# Altium PCB IDC_MCX_Adapter_front.PcbDoc
Units mm, origin at the board's own origin, x right, y up, seen from the top; angles counter-clockwise.
Board outline 37.5 x 106 mm, 4 copper layers (L1, L2, L3, L4), stack 1.527 mm thick; 38 components, 65 nets, 241 pads, 91 vias.
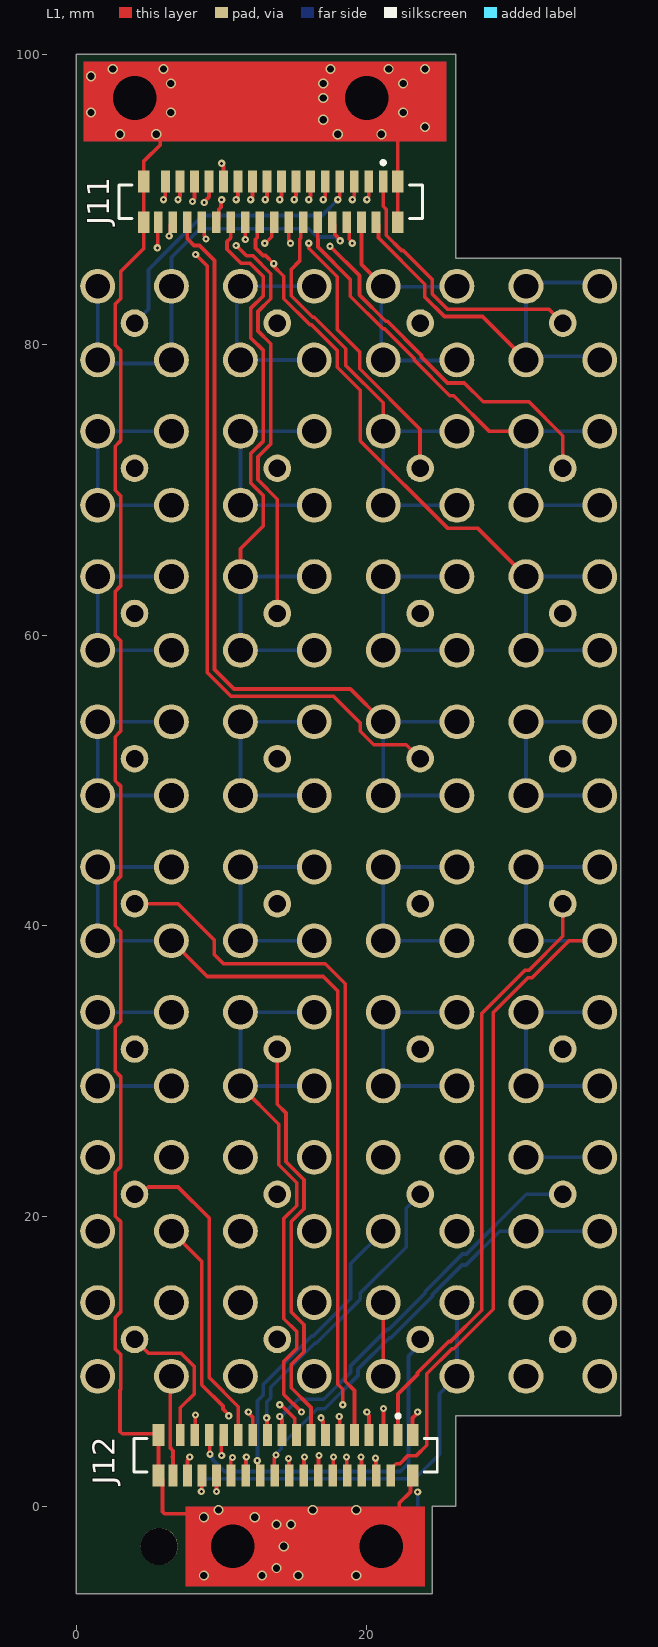
[diagram p0: L1 view]
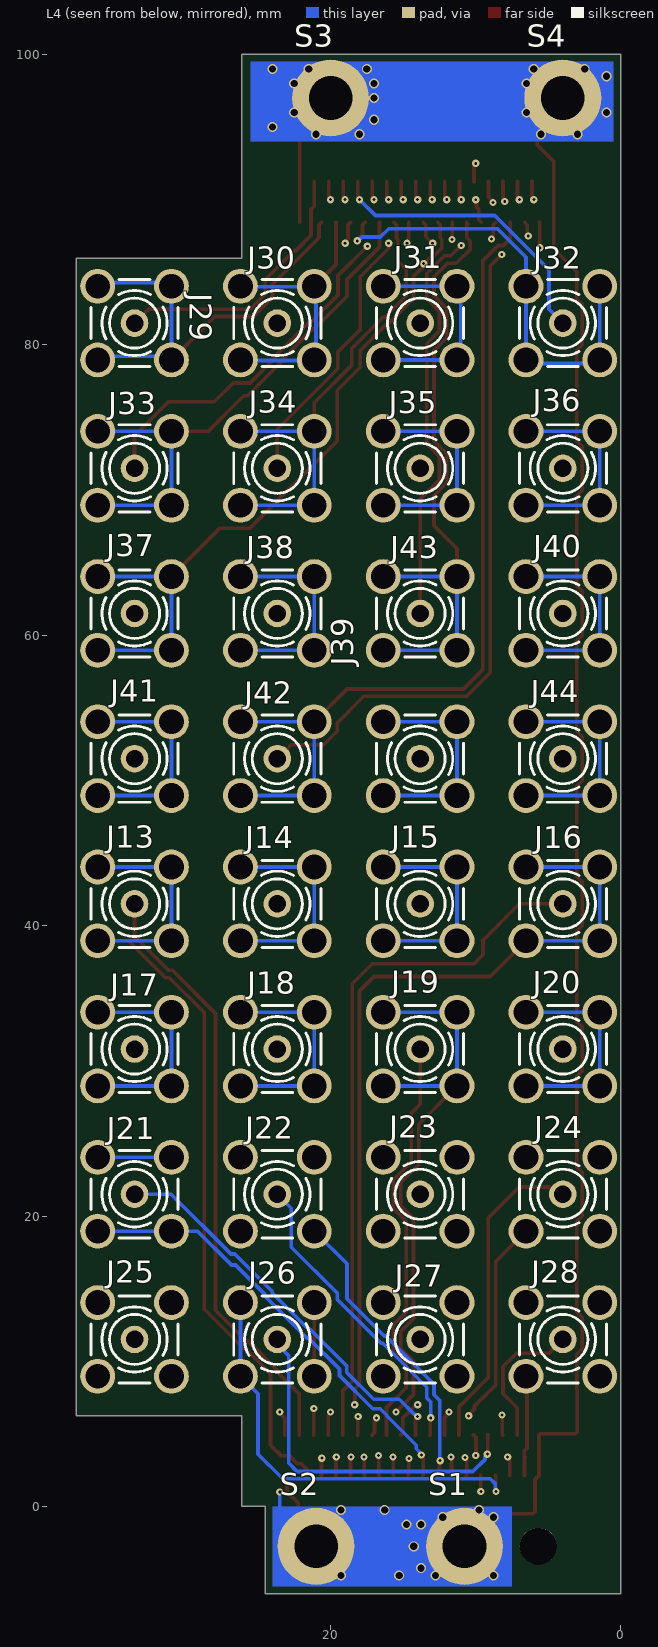
[diagram p1: L4 view, seen from below]
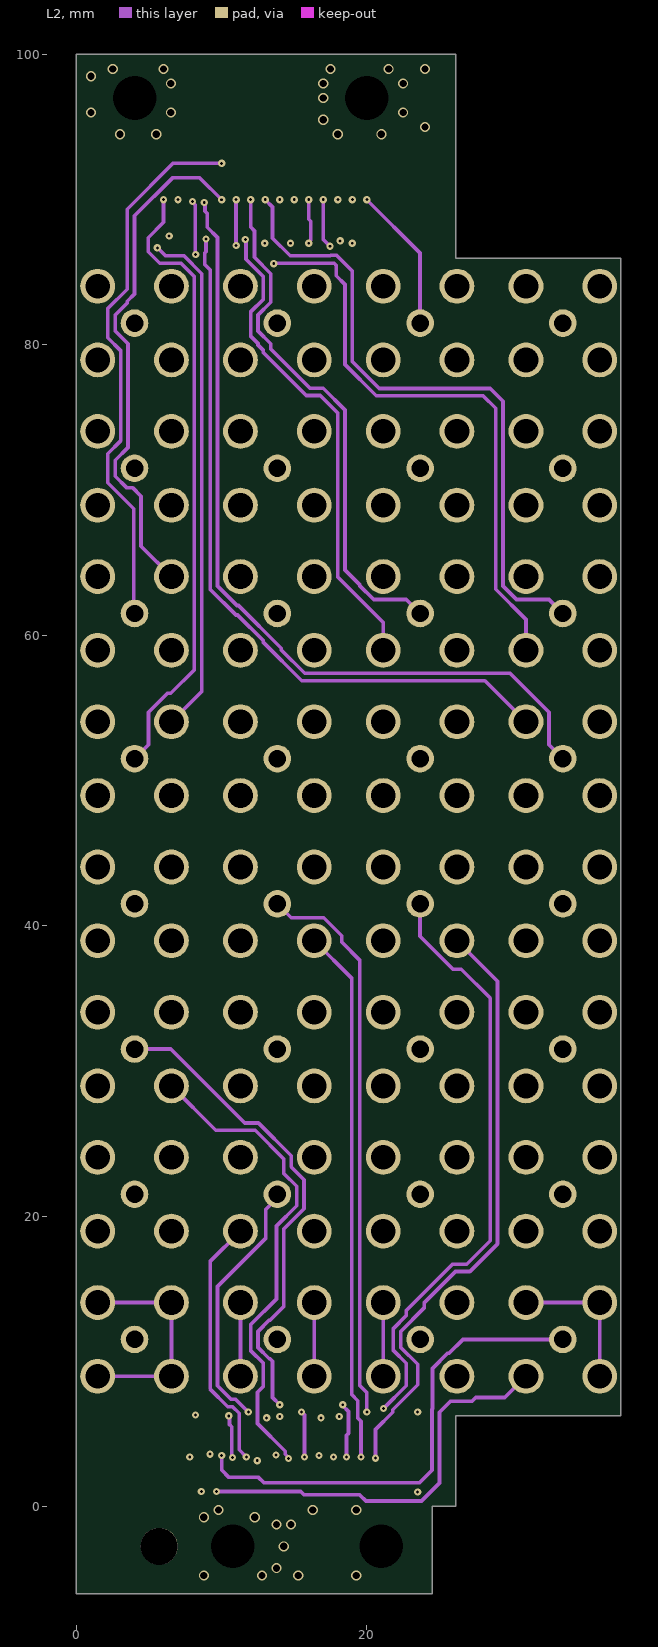
[diagram p2: L2]
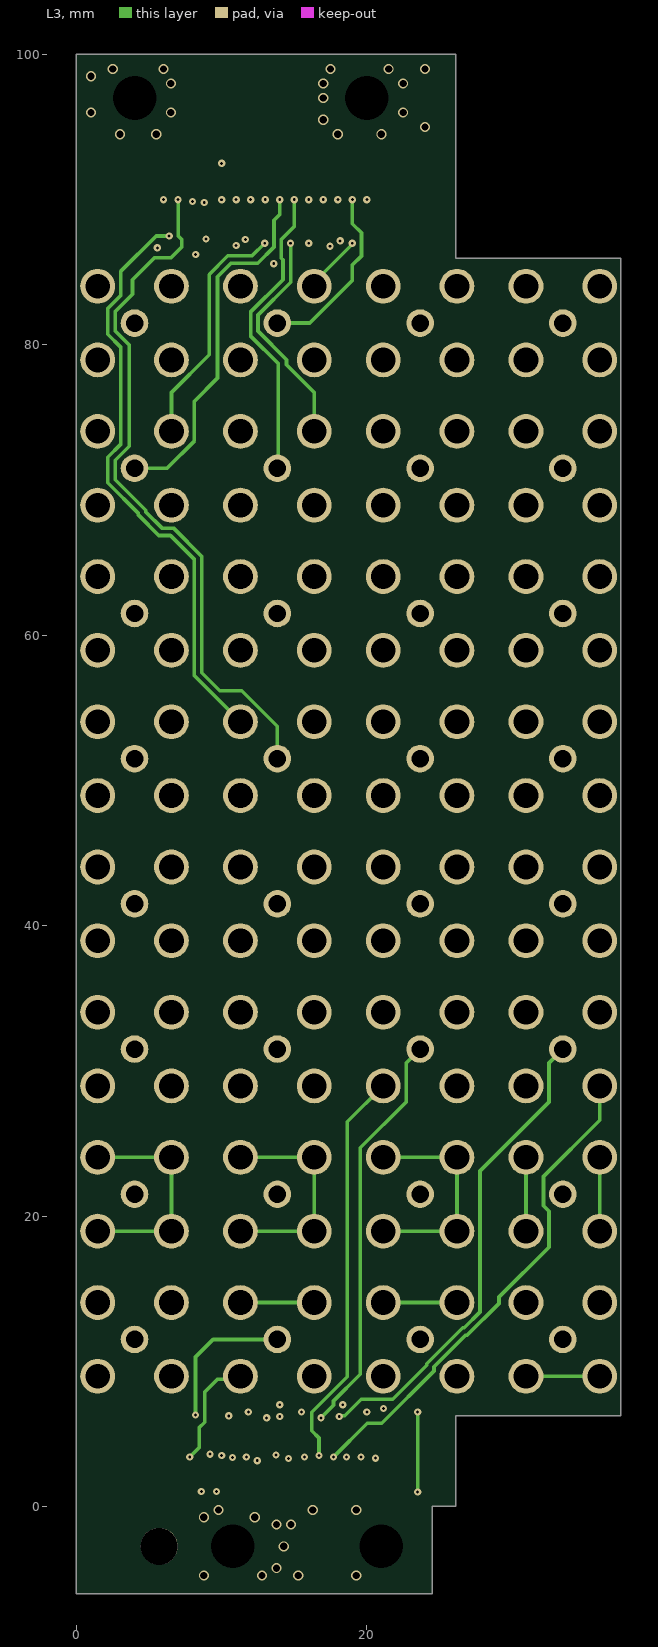
[diagram p3: L3]
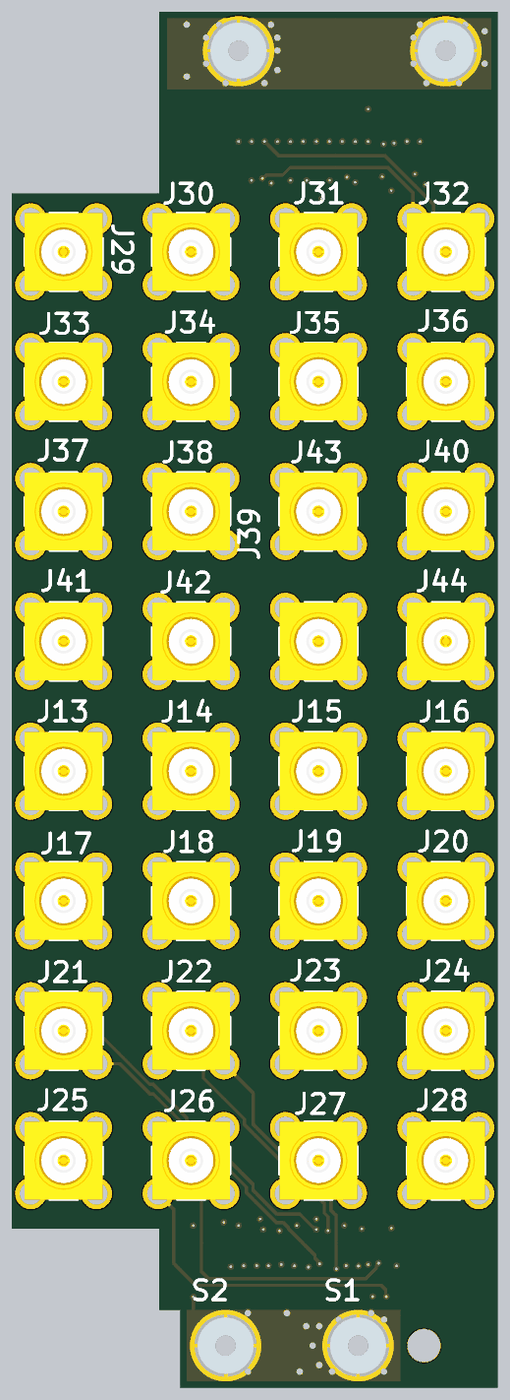
[diagram p4: 3D render of the assembled board from below, using the file's embedded part models]

## Layer stack, top to bottom
Top Solder: solder mask 0.034, Solder Resist, Dk 3.5
L1: signal copper 0.035
Dielectric1: core 0.36, PP-021, Dk 4.7
L2: signal copper 0.018
Dielectric 5a: prepreg 0.7, PP-021, Dk 4.7
L3: signal copper 0.018
Dielectric7: core 0.36, PP-021, Dk 4.7
L4: signal copper 0.0356
Bottom Solder: solder mask 0.034, Solder Resist, Dk 3.5

## Board outline
0,-6 0,100 26.125,100 26.125,85.98 37.5,85.98 37.5,6.25 26.125,6.25 26.125,0 24.5,0 24.5,-6

## Design rules (kind name [scope] priority, off if disabled: settings)
Clearance [All] p1: gap=0.254 ignorepadtopadclearanceinfootprint=FALSE except(0: Arc-Hole Track-Hole SMDPad-Hole THPad-Hole Via-Hole Fill-Hole Poly-Hole Region-Hole Text-Hole)
PolygonConnect [All] p1: connectstyle=Relief reliefconductorwidth=0.254 reliefentries=4 polygonreliefangle="90 Angle" airgapwidth=0.254
RoomDefinition IDC_MCX_Adapter_Front [InComponentClass('IDC_MCX_Adapter_Front')] p1: confinementstyle=ConfineIn formatcopy=TRUE lockcomponents=FALSE outline 38.663,-1.121 337.353,-1.121 337.353,23.68 38.663,23.68
RoutingVias [All] p1: holewidth=0.711 width=1.27 viastyle="Through Hole" minholewidth=0.2 minwidth=0.5 maxholewidth=0.711 maxwidth=1.27
SolderMaskExpansion [All] p1: expansion=0.102 istentingtop=FALSE
Width [All] p1: maxlimit=0.254 minlimit=0.254 preferedwidth=0.254
30 further rules are at their usual default settings.

## Components (designator, comment, footprint, x,y, rotation, side; value= is the part's Value field where it differs from the comment)
J11 "52559-3252" MOLX-52559-3252 13.375,89.85 r180 top
J12 "52559-3252" MOLX-52559-3252 14.4,3.525 r180 top
J13 "MCX" AMPHENOL_919-109J-51PX 33.5,41.5 r90 bottom
J14 "MCX" AMPHENOL_919-109J-51PX 23.667,41.5 r90 bottom
J15 "MCX" AMPHENOL_919-109J-51PX 13.833,41.5 r90 bottom
J16 "MCX" AMPHENOL_919-109J-51PX 4,41.5 r90 bottom
J17 "MCX" AMPHENOL_919-109J-51PX 33.5,31.5 r90 bottom
J18 "MCX" AMPHENOL_919-109J-51PX 23.667,31.5 r90 bottom
J19 "MCX" AMPHENOL_919-109J-51PX 13.833,31.5 r90 bottom
J20 "MCX" AMPHENOL_919-109J-51PX 4,31.5 r90 bottom
J21 "MCX" AMPHENOL_919-109J-51PX 33.5,21.5 r90 bottom
J22 "MCX" AMPHENOL_919-109J-51PX 23.667,21.5 r90 bottom
J23 "MCX" AMPHENOL_919-109J-51PX 13.833,21.5 r90 bottom
J24 "MCX" AMPHENOL_919-109J-51PX 4,21.5 r90 bottom
J25 "MCX" AMPHENOL_919-109J-51PX 33.5,11.5 r90 bottom
J26 "MCX" AMPHENOL_919-109J-51PX 23.667,11.5 r90 bottom
J27 "MCX" AMPHENOL_919-109J-51PX 13.833,11.5 r90 bottom
J28 "MCX" AMPHENOL_919-109J-51PX 4,11.5 r90 bottom
J29 "MCX" AMPHENOL_919-109J-51PX 33.5,81.5 r180 bottom
J30 "MCX" AMPHENOL_919-109J-51PX 23.667,81.5 r90 bottom
J31 "MCX" AMPHENOL_919-109J-51PX 13.833,81.5 r90 bottom
J32 "MCX" AMPHENOL_919-109J-51PX 4,81.5 r90 bottom
J33 "MCX" AMPHENOL_919-109J-51PX 33.5,71.5 r90 bottom
J34 "MCX" AMPHENOL_919-109J-51PX 23.667,71.5 r90 bottom
J35 "MCX" AMPHENOL_919-109J-51PX 13.833,71.5 r90 bottom
J36 "MCX" AMPHENOL_919-109J-51PX 4,71.5 r90 bottom
J37 "MCX" AMPHENOL_919-109J-51PX 33.5,61.5 r90 bottom
J38 "MCX" AMPHENOL_919-109J-51PX 23.667,61.5 r90 bottom
J39 "MCX" AMPHENOL_919-109J-51PX 13.833,61.5 r90 bottom
J40 "MCX" AMPHENOL_919-109J-51PX 4,61.5 r90 bottom
J41 "MCX" AMPHENOL_919-109J-51PX 33.5,51.5 r90 bottom
J42 "MCX" AMPHENOL_919-109J-51PX 23.667,51.5 r90 bottom
J43 "MCX" AMPHENOL_919-109J-51PX 13.833,51.5 r90 bottom
J44 "MCX" AMPHENOL_919-109J-51PX 4,51.5 r180 bottom
S1 "9774035243" 9774035243 10.775,-2.75 r0 bottom
S2 "9774035243" 9774035243 21,-2.75 r0 bottom
S3 "9774035243" 9774035243 20,97 r0 bottom
S4 "9774035243" 9774035243 4,97 r0 bottom

## Footprints (in the part's own frame and the unit in brackets; to place one, negate y for a bottom-side part, rotate by r counter-clockwise, add the part's x,y. Pads: shape width x height; smd on the part's side, far side on the other; paste and mask are expansions set on the pad)
9774035243 [mm] "SMD Steel Spacer with internal Thread"
  round 5.3 smd paste-576.133: 1(0,0)
  round 0 hole 3 unplated: ""(0,0)
  body extent -2.17,-2.17 2.18,2.17, height 3.5
AMPHENOL_919-109J-51PX [mm] "50 Ohm, RF Connector, MCX Straight PCB Receptacle Jack"
  round 1.9 hole 1.2: 1(0,0)
  round 2.4 hole 1.7: 2(-2.54,-2.54) 2(-2.54,2.54) 2(2.54,-2.54) 2(2.54,2.54)
  silkscreen extent -3,-3 3,3, body extent -3,-3 3,3, height 6.06
MOLX-52559-3252 [mm] "FPC Connector, 32-Leads, Vertical, Pitch 0.5 mm, Mated Height 3.9 mm, SMT"
  rect 0.6x1.5 smd: 1(-7.75,-1.4) 2(-7.25,1.4) 3(-6.75,-1.4) 4(-6.25,1.4) 5(-5.75,-1.4) 6(-5.25,1.4) 7(-4.75,-1.4) 8(-4.25,1.4) 9(-3.75,-1.4) 10(-3.25,1.4) 11(-2.75,-1.4) 12(-2.25,1.4) 13(-1.75,-1.4) 14(-1.25,1.4) 15(-0.75,-1.4) 16(-0.25,1.4) 17(0.25,-1.4) 18(0.75,1.4) 19(1.25,-1.4) 20(1.75,1.4) 21(2.25,-1.4) 22(2.75,1.4) 23(3.25,-1.4) 24(3.75,1.4) 25(4.25,-1.4) 26(4.75,1.4) 27(5.25,-1.4) 28(5.75,1.4) 29(6.25,-1.4) 30(6.75,1.4) 31(7.25,-1.4) 32(7.75,1.4)
  rect 0.8x1.5 smd: MP1(-8.75,-1.4) MP2(-8.75,1.4) MP3(8.75,-1.4) MP4(8.75,1.4)
  silkscreen extent -10.45,-2.82 10.45,1.15, body extent -10.85,-1.65 10.85,1.85, height 5.3

## Part data
J11 J12: library part CMP-1241-00306-1, "0.5 mm Pitch Easy-On(TM) Type FPC Connector, 3.9 mm Mated Height, Vertical, ZIF, SMT, 32 Circuits, -40 to 85 degC, ELV and RoHS Compliant, Tape and Reel", Current (Max per Contact)=0.5A, Manufacturer=Molex, Voltage (Max)="50V AC (RMS)/DC", Circuits (Loaded)=32, ComponentLink1Description="Manufacturer URL", ComponentLink1URL=http://www.molex.com/molex/index.jsp, ComponentLink2Description=Datasheet, ComponentLink2URL=http://www.molex.com/webdocs/datasheets/pdf/en-us/0525593252_FFC_FPC_CONNECTORS.pdf, ComponentLink3Description="Package Specification", ComponentLink3URL=http://www.molex.com/pdm_docs/sd/525593252_sd.pdf, Contact Position=N/A, Durability (mating cycles max)=20, Entry Angle=Vertical, Mated Height=3.90mm, Material - Metal="Phosphor Bronze", Material - Plating Mating=Gold, Material - Plating Termination=Tin, Mounting Technology="Surface Mount", Number of Rows=1, Orientation=Vertical, PackageDescription="32-Lead FPC Connector, Pitch 0.5 mm", PackageReference=52559-3252, PackageVersion="Rev. B, 12/2011", Packing="Tape and Reel", PartNumber=52559-3252, PCB Locator=No, PCB Retention=Yes, Pitch - Mating Interface=0.50mm, Polarized to PCB=No, RoHS=TRUE, Stackable=No
J13 J14 J15 J16 J17 J18 J19 J20 J21 J22 J23 J24 J25 J26 J27 J28 J29 J30 J31 J32 J33 J34 J35 J36 J37 J38 J39 J40 J41 J42 J43 J44: library part AMPHENOL_919-109J-51PX, Manufacturer=AMPHENOL, Manufacturer Part Number="919-109J-51PX (MCX6251B1-3GT30G-50)", Author="CERN DEM BC", Component Type=Standard, ComponentHeight=6.06mm, CreateDate=31.01.2019, Family=MCX, HelpURL=\\cern.ch\dfs\Applications\Altium\Datasheets\AMPHENOL_919-109J-51PX.pdf, LatestRevisionDate=31.01.2019, Mounted=Yes, Part Description="50 Ohm, RF Connector, MCX Straight PCB Receptacle Jack", Part Number=AMPHENOL_919-109J-51PX, Pin Count=5, PressFit=No, Sense=No, SMD=No, Socket=No, Status=None
S1 S2 S3 S4: library part "WA-SMSI,  9774035243", "WA-SMSI SMD Steel Spacer with internal Thread", Manufacturer="Wurth Elektronik", ComponentLink1Description=Manufacturer, ComponentLink1URL=http://www.we-online.de, ComponentLink2Description=Datasheet, ComponentLink2URL=http://katalog.we-online.de/em/datasheet/9774035243.pdf, Created by="Baojun Chen", Created Date=20.Oct.2015, partNo=9774035243

## Free pads (board coordinates)
  round 2.55 hole 2.55: 1(5.695,-2.75)

## Via types
v1: diameter 0.5, hole 0.2, L1 to L4, tented both sides, 59 vias
v2: diameter 0.7, hole 0.5, L1 to L4, tented both sides, 32 vias

## Nets (pads, with @x,y where several pads share a name; then routed paths per layer and width w, separated by ;. In a path a pad name is that pad's centre, name@x,y a point inside that pad or via, vN(x,y) a via of type N, cw(c..) or ccw(c..) an arc to the next point about the centre after c; other vN are vias at no path point)
CH1: J11.1 J29.1 | length 19
  L1 w0.254: J11.1 21.125,89.539 21.344,89.32 21.344,87.542 22.386,86.5 22.5,86.5 24.5,84.5 24.5,83.511 25.552,82.459 32.541,82.459 J29.1
CH2: J11.3 J30.1 | length 11.3
  L1 w0.254: v1(20,90) 20,90.067 20.125,90.192 J11.3
  L2 w0.254: v1(20,90) 23.667,86.333 J30.1
CH3: J11.5 J31.1 | length 13.5
  L1 w0.254: v1@19.125,90.192 J11.5
  L3 w0.254: J31.1 16.069,81.5 19,84.431 19,85.5 19.625,86.125 19.625,87.717 19,88.342 v1(19,90)
CH4: J11.7 J32.1 | length 20.4
  L1 w0.254: v1(18,90) 18,90.067 18.125,90.192 J11.7
  L4 w0.254: J32.1 4.959,82.459 4.959,85.177 6.032,86.25 8.692,88.911 16.911,88.911 v1(18,90)
CH5: J11.9 J33.1 | length 29.2
  L1 w0.254: v1(17,90) 17,90.067 17.125,90.192 J11.9 ; v1(17.468,86.791) 19.49,84.77 19.49,83.441 21.303,81.627 21.413,81.627 23.766,79.275 23.766,79.165 25.552,77.379 26.707,77.379 28.011,76.075 31.161,76.075 33.5,73.736 J33.1
  L2 w0.254: v1(17,90) 17,87.26 v1(17.468,86.791)
CH6: J11.11 J34.1 | length 23.1
  L1 w0.254: v1(16,87) 16,86.649 17.954,84.695 17.954,81.052 19.503,79.503 19.503,78.348 23.667,74.184 J34.1 ; v1(16,90) 16,90.067 16.125,90.192 J11.11
  L2 w0.254: v1(16,87) 16,87.067 16.139,87.206 16.139,88.511 16,88.65 v1(16,90)
CH7: J11.13 J35.1 | length 22
  L1 w0.254: v1(15,90) 15,90.067 15.125,90.192 J11.13
  L3 w0.254: J35.1 13.89,71.557 13.89,78.713 11.994,80.609 11.994,82.262 14.221,84.489 14.221,85.851 14.107,85.965 14.107,87.261 15,88.154 v1(15,90)
CH8: J11.15 J36.1 | length 26.3
  L1 w0.254: v1(14,90) 14,90.067 14.125,90.192 J11.15
  L3 w0.254: J36.1 6.236,71.5 8.121,73.385 8.121,76.121 9.712,77.712 9.712,84.695 10.638,85.621 12.481,85.621 13.599,86.739 13.599,88.582 14,88.983 v1(14,90)
CH9: J11.17 J37.1 | length 46
  L1 w0.254: v1(13,90) 13,90.067 13.125,90.192 J11.17
  L2 w0.254: v1(13,90) 13.5,89.5 13.5,87.346 14.717,86.129 17.471,86.129 17.504,86.161 17.924,86.161 19,85.086 19,78.851 20.851,77 28.5,77 29.379,76.121 29.379,63.385 30.305,62.459 32.541,62.459 J37.1
CH10: J11.19 J38.1 | length 37.2
  L1 w0.254: v1(12,90) 12,90.067 12.125,90.192 J11.19
  L2 w0.254: v1(12,90) 12,88.11 12.262,87.848 12.262,86.025 13.382,84.905 13.382,82.931 12.502,82.051 12.502,80.949 13.382,80.069 13.382,79.715 16.083,77.014 17,77.014 18.5,75.514 18.5,64.5 19.5,63.5 19.5,63.431 20.472,62.459 22.708,62.459 J38.1
CH11: J11.21 J39.1 | length 32.7
  L1 w0.254: v1(11,86.849) 11.72,86.129 12.158,86.129 13.382,84.905 13.382,83.175 12.502,82.295 12.502,80.949 13.382,80.069 13.382,73.175 12.502,72.295 12.502,70.705 13.833,69.374 J39.1 ; v1(11,90) 11,90.067 11.125,90.192 J11.21
  L2 w0.254: v1(11,86.849) 10.994,86.855 10.994,89.994 v1(11,90)
CH12: J11.23 J40.1 | length 39
  L1 w0.254: v1(10,92.5) 10,92.433 10.125,92.308 J11.23
  L2 w0.254: J40.1 3.943,61.557 3.943,68.713 2.161,70.495 2.161,72.505 3.041,73.385 3.041,79.615 2.161,80.495 2.161,82.505 3.492,83.836 3.492,89.343 6.649,92.5 v1(10,92.5)
CH13: J11.25 J41.1 | length 58.5
  L1 w0.254: v1(8.804,89.804) 8.804,89.87 9.125,90.192 J11.25
  L2 w0.254: v1(8.804,89.804) 8.851,89.757 8.851,89.195 9,89.046 9,88.104 9.712,87.392 9.712,63.385 11.052,62.045 11.162,62.045 14.11,59.097 14.11,58.987 15.718,57.379 29.857,57.379 32.541,54.695 32.541,52.459 J41.1
CH14: J11.27 J42.1 | length 51.7
  L1 w0.254: v1(8,89.869) 8,89.936 8.125,90.061 J11.27 ; v1(8.21,86.216) 9,85.427 9,57.43 10.639,55.792 17.708,55.792 19.546,53.954 19.546,53.385 20.472,52.459 22.708,52.459 J42.1
  L2 w0.254: v1(8,89.869) 8,89.802 8.173,89.63 8.173,86.254 v1(8.21,86.216)
CH15: J11.29 J43.1 | length 49
  L1 w0.254: v1@7.125,90.192 J11.29
  L3 w0.254: v1(7,90) 7,88.702 7.017,88.684 7.017,87.5 7.256,87.261 7.256,86.739 6.516,85.998 5.371,85.998 3.857,84.484 3.857,83.483 2.669,82.295 2.669,80.949 3.628,79.99 3.628,73.01 2.669,72.051 2.669,70.705 4.773,68.601 4.773,68.491 5.885,67.379 6.679,67.379 8.629,65.429 8.629,57.422 9.873,56.178 11.391,56.178 13.833,53.736 J43.1
CH16: J11.31 J44.1 | length 44.3
  L1 w0.254: v1(6,90) 6,90.067 6.125,90.192 J11.31
  L2 w0.254: J44.1 4.959,52.459 4.959,54.695 6.264,56 6.5,56 8.121,57.621 8.121,84.695 7.195,85.621 5.737,85.621 4.939,86.419 4.939,87.385 6,88.445 v1(6,90)
CH17: J12.1 J13.1 | length 41.5
  L1 w0.254: J12.1 22.15,7.747 23.492,9.089 23.492,9.21 25.646,11.364 25.767,11.364 27.921,13.518 27.921,33.955 30.893,36.927 31.163,36.927 33.5,39.264 J13.1
CH18: J12.3 J14.1 | length 43.3
  L1 w0.254: J12.3 v1(21.15,6.747)
  L2 w0.254: v1(21.15,6.747) 22.708,8.305 22.708,9.858 21.828,10.738 21.828,12.262 22.708,13.142 22.708,13.495 25.896,16.684 26.885,16.684 28.492,18.291 28.492,35.008 26.5,37 25.931,37 23.667,39.264 J14.1
CH19: J12.5 J15.1 | length 40.5
  L1 w0.254: v1(20,6.5) 20,6.433 20.15,6.283 J12.5
  L2 w0.254: J15.1 14.792,40.541 17.028,40.541 18.264,39.305 18.264,38.868 19.5,37.632 19.5,8.351 20,7.851 v1(20,6.5)
CH20: J12.7 J16.1 | length 48.7
  L1 w0.254: J16.1 7,41.5 9.5,39 9.5,38 10.121,37.379 17.129,37.379 18.508,36 18.508,8.624 19.15,7.982 J12.7
CH21: J12.9 J17.1 | length 34.5
  L1 w0.254: v1(18.1,6.2) 18.125,6.175 18.125,4.95 J12.9
  L3 w0.254: v1(18.1,6.2) 18.147,6.247 18.478,6.247 19.61,7.379 21.782,7.379 24.118,9.715 24.118,9.825 26.598,12.306 26.708,12.306 27.788,13.385 27.788,23.104 32.541,27.857 32.541,30.541 J17.1
CH22: J12.11 J18.1 | length 29.5
  L1 w0.254: v1(16.838,6.1) 16.838,6.033 16.977,5.894 16.977,5.098 J12.11
  L3 w0.254: v1(16.838,6.1) 17.708,6.97 17.708,7.261 19.546,9.099 19.546,24.695 22.708,27.857 22.708,30.541 J18.1
CH23: J12.13 J19.1 | length 29
  L1 w0.254: J19.1 13.833,27.699 14.433,27.1 14.433,23.744 15.672,22.505 15.672,20.495 14.792,19.615 14.792,13.385 15.672,12.505 15.672,10.658 14.792,9.778 14.792,8.174 16.15,6.816 J12.13
CH24: J12.15 J20.1 | length 36
  L1 w0.254: v1(14,7) 14.092,7 15.036,6.056 15.036,5.039 J12.15
  L2 w0.254: J20.1 6.5,31.5 11.592,26.408 12.531,26.408 14.792,24.147 14.792,23.385 15.672,22.505 15.672,20.495 14.284,19.107 14.284,13.764 13.351,12.831 13.282,12.831 12.502,12.051 12.502,10.949 13.282,10.169 13.331,10.169 13.5,10 13.5,7.5 v1(14,7)
CH25: J12.17 J21.1 | length 27.5
  L1 w0.254: v1(14,6.2) 14,6.133 14.15,5.983 J12.17
  L4 w0.254: v1(14,6.2) 14.067,6.2 14.236,6.369 14.261,6.369 15.271,7.379 17.028,7.379 18.879,9.231 18.879,9.667 21.392,12.179 21.502,12.179 24.014,14.691 24.014,14.801 26.591,17.379 26.862,17.379 30.983,21.5 J21.1
CH26: J12.19 J22.1 | length 21
  L1 w0.254: v1(13.1,6.1) 13.125,6.075 13.125,4.95 J12.19
  L4 w0.254: v1(13.1,6.1) 13.1,7.193 13.382,7.475 13.382,8.205 16.409,11.232 16.519,11.232 19.546,14.258 19.546,14.695 22.708,17.857 22.708,20.541 J22.1
CH27: J12.21 J23.1 | length 19.5
  L1 w0.254: v1(11.838,6.5) 11.838,6.433 12.15,6.121 J12.21
  L2 w0.254: v1(11.838,6.5) 10.959,7.379 10.638,7.379 9.712,8.305 9.712,15.143 13.026,18.457 13.026,20.424 13.833,21.231 J23.1
CH28: J12.23 J24.1 | length 22
  L1 w0.254: J24.1 4.445,21.5 4.945,22 7,22 9.137,19.863 9.137,8.88 11.15,6.867 J12.23
CH29: J12.25 J25.1 | length 34.5
  L1 w0.254: v1(10,3.5) 9.977,3.523 9.977,4.752 J12.25
  L2 w0.254: v1(10,3.5) 10,2.5 10.5,2 12.539,2 12.908,1.631 23.631,1.631 24.492,2.492 24.492,6.694 24.516,6.718 24.516,9.505 25.552,10.541 25.662,10.541 26.621,11.5 J25.1
CH30: J12.27 J26.1 | length 24.7
  L1 w0.254: J12.27 9.175,4.9 9.175,3.625 v1(9.2,3.6)
  L4 w0.254: v1(9.2,3.6) 9.2,3.533 9.369,3.364 9.369,3.239 10.2,2.408 22.308,2.408 22.869,2.969 22.869,10.353 23.667,11.151 J26.1
CH31: J12.29 J27.1 | length 11.5
  L1 w0.254: J12.29 8.175,4.95 8.175,6.275 v1(8.2,6.3)
  L3 w0.254: v1(8.2,6.3) 8.2,10.288 9.412,11.5 J27.1
CH32: J12.31 J28.1 | length 10
  L1 w0.254: J28.1 4.959,10.541 7.195,10.541 8.121,9.615 8.121,7.76 7.15,6.789 J12.31
GND: J11.MP1 J11.MP2 J11.MP3 J11.MP4 J12.MP1 J12.MP2 J12.MP3 J12.MP4 S1.1 S2.1 S3.1 S4.1 | length 196
  L1 w0.254: v2(8.775,-4.75) v2(12.775,-4.75) ; v2(8.775,-0.75) v2(12.275,-0.75) 16.25,-0.75 18.25,-2.75 ; v2(16.275,-0.25) 14,-0.25 ; J11.MP2 J11.MP1 22.125,94.127 21.752,94.5 v2(21,94.5) v2(18,94.5) 6.141,94.5 5.768,94.127 5.768,93.768 4.625,92.625 J11.MP3 J11.MP4 4.625,86.625 3.041,85.041 3.041,83.181 2.669,82.809 2.669,79.987 3.041,79.615 3.041,73.385 2.669,73.013 2.669,69.987 3.041,69.615 3.041,63.385 2.669,63.013 2.669,59.987 3.041,59.615 3.041,53.385 2.669,53.013 2.669,49.987 3.041,49.615 3.041,43.385 2.669,43.013 2.669,39.987 3.041,39.615 3.041,33.385 2.669,33.013 2.669,29.987 3.041,29.615 3.041,23.385 2.669,23.013 2.669,19.987 3.041,19.615 3.041,13.385 2.669,13.013 2.669,10.845 3.041,10.473 3.041,8.041 3,8 3,5.149 3.149,5 5.575,5 J12.MP3 J12.MP4 5.923,1.852 5.923,-0.351 6.072,-0.5 8.896,-0.5 9.061,-0.335 9.69,-0.335 v2(9.775,-0.25) 14,-0.25 ; J12.MP2 23,1.975 23,1 22.232,0.232 22.232,-0.127 19.609,-2.75 18.25,-2.75 ; J12.MP1 23.15,6.083 23.5,6.433 v1(23.5,6.5) ; 14,-0.25 15.75,-0.25 18.25,-2.75
  L3 w0.254: v1(23.5,1) v1(23.5,6.5)
  L4 w0.254: v2(8.775,-4.75) 9.127,-4.398 9.479,-4.75 S1.1@10.775,-4.75 ; v2(8.775,-0.75) 9.127,-1.102 9.479,-0.75 S1.1@10.775,-0.75 ; v2(9.775,-0.25) v2(16.275,-0.25) ; v2(12.775,-4.75) 12.627,-4.602 12.627,-4.194 12.071,-4.75 S1.1@10.775,-4.75 ; 18.25,-2.75 16.25,-0.75 v2(12.275,-0.75) S1.1@10.775,-0.75 ; 23,-0.5 23.127,-0.5 23.5,-0.127 v1(23.5,1) ; S1.1@10.775,-4.75 S1.1 S1.1@10.775,-0.75
  other v2: 15.275,-4.75 19.275,-4.75 13.775,-4.25 14.275,-2.75 13.775,-1.25 14.775,-1.25 19.275,-0.25 3,94.5 5.5,94.5 24,95 17,95.5 1,96 6.5,96 22.5,96 17,97 6.5,98 17,98 22.5,98 1,98.5 2.5,99 6,99 17.5,99 21.5,99 24,99
NetJ11_2: J11.2 J29.2 | length 30.6
  L1 w0.254: J11.2 20.798,88.277 20.798,87.37 23.992,84.176 23.992,83.3 25.341,81.951 27.072,81.951 27.969,81.951 J29.2@30.96,78.96
  L4 w0.254: J29.2@36.04,79.21 30.96,79.21 30.96,84.04 30.96,84.29 J29.2@36.04,84.29
NetJ11_4: J11.4 J30.2 | length 20.3
  L1 w0.254: J11.4 19.625,85.542 J30.2@21.127,84.04
  L4 w0.254: J30.2@26.08,78.92 21,78.92 21,84 J30.2@26.08,84
NetJ11_6: J11.6 J31.2 | length 20.9
  L1 w0.254: J11.6 18.794,88.281 18.794,87.267 18.994,87.067 v1(18.994,87)
  L3 w0.254: J31.2@16.373,84.04 16.373,84.312 18.994,86.933 v1(18.994,87)
  L4 w0.254: J31.2@16.123,78.96 11.043,78.96 11.043,84.04 J31.2@16.123,84.04
NetJ11_8: J11.8 J32.2 | length 31.5
  L1 w0.254: J11.8 17.798,88.277 17.798,87.595 18.163,87.23 v1(18.163,87.163)
  L4 w0.254: J32.2@1.46,83.79 1.46,78.71 6.54,78.71 6.54,78.96 J32.2@6.54,83.79 ; J32.2@6.54,84.04 6.54,86.04 8.5,88 16,88 16.578,87.422 17.837,87.422 18.096,87.163 v1(18.163,87.163)
NetJ11_10: J11.10 J33.2 | length 37.3
  L1 w0.254: J11.10 16.625,87.267 16.631,87.261 16.631,86.736 18.862,84.505 18.862,83.35 21.093,81.119 21.203,81.119 23.258,79.064 23.258,78.954 25.715,76.497 25.985,76.497 28.443,74.04 J33.2@30.96,74.04
  L4 w0.254: J33.2@36.04,68.96 30.96,68.96 30.96,74.04 J33.2@36.04,74.04
NetJ11_12: J11.12 J34.2 | length 32.7
  L1 w0.254: J11.12 15.452,88.277 15.452,87.344 15.369,87.261 15.369,85.767 14.792,85.19 14.792,83.385 16.274,81.903 16.384,81.903 18.55,79.737 18.55,78.582 21.127,76.006 J34.2@21.127,74.04
  L4 w0.254: J34.2@26.207,68.96 21.127,68.96 21.127,74.04 J34.2@26.207,74.04
NetJ11_14: J11.14 J35.2 | length 32
  L1 w0.254: v1@14.625,87.18 J11.14
  L3 w0.254: v1(14.738,87) 14.757,86.981 14.757,84.307 12.502,82.051 12.502,80.949 14.469,78.982 14.469,78.628 16.373,76.724 J35.2@16.373,74.04
  L4 w0.254: J35.2@16.373,68.96 11.293,68.96 11.293,74.04 J35.2@16.373,74.04
NetJ11_16: J11.16 J36.2 | length 33.6
  L1 w0.254: v1(12.968,87) 13,87 13.452,87.452 13.452,88.277 J11.16
  L3 w0.254: J36.2@6.54,74.04 6.54,76.724 9.137,79.321 9.137,84.838 10.428,86.129 12.097,86.129 v1(12.968,87)
  L4 w0.254: J36.2@6.54,68.96 1.46,68.96 1.46,74.04 J36.2@6.54,74.04
NetJ11_18: J11.18 J37.2 | length 89.4
  L1 w0.254: J11.18 12.452,88.277 12.452,87.376 12.337,87.261 12.337,86.669 12.853,86.153 13.027,86.153 v1(13.59,85.59) ; v1@13.503,85.503 14.284,84.722 14.284,83.175 16.064,81.395 16.174,81.395 17.954,79.615 17.954,78.46 19.546,76.868 19.546,73.385 25.552,67.379 27.621,67.379 J37.2@30.96,64.04
  L2 w0.254: v1(13.59,85.59) 13.621,85.621 17.746,85.621 17.895,85.472 17.895,84.754 18.492,84.157 18.492,78.64 20.64,76.492 28.008,76.492 28.871,75.629 28.871,63.175 30.96,61.086 J37.2@30.96,58.96
  L4 w0.254: J37.2@36.04,58.96 30.96,58.96 30.96,64.04 J37.2@36.04,64.04
NetJ11_20: J11.20 J38.2 | length 50
  L1 w0.254: J11.20 11.625,87.267 v1(11.631,87.261)
  L2 w0.254: v1(11.631,87.261) 11.672,87.22 11.672,85.897 12.874,84.695 12.874,83.142 11.994,82.262 11.994,80.609 12.502,80.101 12.502,79.987 12.874,79.615 12.874,79.465 15.833,76.506 16.79,76.506 17.992,75.303 17.992,64.008 21.127,60.873 J38.2@21.127,58.96
  L4 w0.254: J38.2@26.207,58.96 21.127,58.96 21.127,64.04 J38.2@26.207,64.04
NetJ11_22: J11.22 J39.2 | length 43.4
  L1 w0.254: J11.22@10.522,88.347 J11.22 10.625,87.366 10.369,87.11 10.369,86.587 11.335,85.621 11.948,85.621 12.874,84.695 12.874,83.385 11.994,82.505 11.994,80.495 12.874,79.615 12.874,73.385 11.994,72.505 11.994,70.495 12.874,69.615 12.874,67.539 11.293,65.958 J39.2@11.293,64.04
  L4 w0.254: J39.2@16.373,58.96 11.293,58.96 11.293,64.04 J39.2@16.373,64.04
NetJ11_24: J11.24 J40.2 | length 52.6
  L1 w0.254: J11.24 9.798,88.623 9.798,89.319 9.953,89.474 9.953,89.949 v1(10,89.996)
  L2 w0.254: J40.2@6.54,64.04 4.451,66.129 4.451,69.569 3.851,70.169 3.449,70.169 2.669,70.949 2.669,72.051 3.549,72.931 3.549,80.069 2.669,80.949 2.669,82.051 3.5,82.882 3.5,83 4,83.5 4,88.892 6.608,91.5 8.496,91.5 v1(10,89.996)
  L4 w0.254: J40.2@6.54,58.96 1.46,58.96 1.46,64.04 J40.2@6.54,64.04
NetJ11_26: J11.26 J41.2 | length 66.4
  L1 w0.254: J11.26 8.798,88.277 8.798,87.48 8.918,87.36 v1(8.918,87.293)
  L2 w0.254: v1(8.918,87.293) 8.918,86.422 8.841,86.345 8.841,85.54 9.204,85.177 9.204,63.175 10.984,61.395 11.094,61.395 12.874,59.615 12.874,59.505 15.508,56.871 28.129,56.871 J41.2@30.96,54.04
  L4 w0.254: J41.2@36.04,48.96 30.96,48.96 30.96,54.04 J41.2@36.04,54.04
NetJ11_28: J11.28 J42.2 | length 60.2
  L1 w0.254: J11.28 7.625,87.319 8.097,86.847 8.472,86.847 9.508,85.811 9.508,57.641 10.849,56.3 18.867,56.3 J42.2@21.127,54.04
  L4 w0.254: J42.2@26.207,48.96 21.127,48.96 21.127,54.04 J42.2@26.207,54.04
NetJ11_30: J11.30 J43.2 | length 57
  L1 w0.254: v1(6.386,87.497) 6.386,87.564 6.452,87.629 6.452,88.277 J11.30
  L3 w0.254: v1(6.386,87.497) 5.495,87.497 3.041,85.044 3.041,83.385 2.161,82.505 2.161,80.738 3.041,79.858 3.041,73.142 2.161,72.262 2.161,70.495 4.265,68.391 4.265,68.281 5.675,66.871 6.469,66.871 8.121,65.219 8.121,57.212 J43.2@11.293,54.04
  L4 w0.254: J43.2@16.373,48.96 11.293,48.96 11.293,54.04 J43.2@16.373,54.04
NetJ11_32: J11.32 J44.2 | length 52.6
  L1 w0.254: v1(5.57,86.68) 5.598,86.708 5.598,88.423 J11.32
  L2 w0.254: v1(5.57,86.68) 5.574,86.68 6.125,86.129 7.405,86.129 8.629,84.905 8.629,56.129 J44.2@6.54,54.04
  L4 w0.254: J44.2@6.54,48.96 1.46,48.96 1.46,54.04 J44.2@6.54,54.04
NetJ12_2: J12.2 J13.2 | length 60
  L1 w0.254: J12.2 21.65,2.575 22.021,2.946 22.282,2.946 22.836,3.5 23.414,3.5 24.131,4.217 24.131,9.131 25.856,10.856 25.977,10.856 28.701,13.58 28.701,34.017 31.103,36.419 31.374,36.419 33.914,38.96 J13.2@36.04,38.96
  L4 w0.254: J13.2@36.04,38.96 30.96,38.96 30.96,44.04 J13.2@36.04,44.04
NetJ12_4: J12.4 J14.2 | length 58.8
  L1 w0.254: v1(20.6,3.321) 20.625,3.296 20.625,2.15 J12.4
  L2 w0.254: v1(20.6,3.321) 20.6,5.305 21.781,6.486 21.781,6.66 23.5,8.379 23.5,9.784 22.336,10.949 22.336,12.051 23.944,13.659 23.944,14.013 26.107,16.176 27.095,16.176 29,18.081 29,36.167 J14.2@26.207,38.96 ; J14.2@21.127,38.96 J14.2@21.53,38.557
  L4 w0.254: J14.2@26.207,38.96 21.127,38.96 21.127,44.04 J14.2@26.207,44.04
NetJ12_6: J12.6 J15.2 | length 53.4
  L1 w0.254: v1(19.6,3.4) 19.625,3.375 19.625,2.15 J12.6
  L2 w0.254: J15.2@16.373,38.96 18.97,36.363 18.97,7.685 19.369,7.286 19.369,6.09 19.6,5.859 v1(19.6,3.4)
  L4 w0.254: J15.2@16.373,38.96 11.293,38.96 11.293,44.04 J15.2@16.373,44.04
NetJ12_8: J12.8 J16.2 | length 61.9
  L1 w0.254: J16.2@6.54,38.96 9,36.5 17,36.5 18,35.5 18,8.414 18.339,8.075 v1(18.339,7) ; v1(18.6,3.4) 18.625,3.375 18.625,2.15 J12.8
  L2 w0.254: v1(18.339,7) 18.339,6.933 18.731,6.541 18.731,5.029 18.6,4.898 v1(18.6,3.4)
  L4 w0.254: J16.2@6.54,38.96 1.46,38.96 1.46,44.04 J16.2@6.54,44.04
NetJ12_10: J12.10 J17.2 | length 50.6
  L1 w0.254: J12.10 17.675,2.15 17.675,3.375 v1(17.7,3.4)
  L3 w0.254: v1(17.7,3.4) 20.035,5.735 21.03,5.735 24.626,9.331 24.626,9.615 26.808,11.798 26.919,11.798 29.101,13.981 29.101,14.417 32.541,17.857 32.541,20.331 32.169,20.703 32.169,22.728 36.04,26.599 J17.2@36.04,28.96
  L4 w0.254: J17.2@36.04,28.96 30.96,28.96 30.96,34.04 J17.2@36.04,34.04
NetJ12_12: J12.12 J18.2 | length 44.3
  L1 w0.254: J12.12 16.675,2.15 16.675,3.475 v1(16.7,3.5)
  L3 w0.254: v1(16.7,3.5) 16.7,4.717 16.207,5.21 16.207,6.479 18.658,8.93 18.658,26.491 J18.2@21.127,28.96
  L4 w0.254: J18.2@26.207,28.96 21.127,28.96 21.127,34.04 J18.2@26.207,34.04
NetJ12_14: J12.14 J19.2 | length 45.4
  L1 w0.254: J19.2@11.293,28.96 13.925,26.328 13.925,23.534 15.164,22.295 15.164,20.705 14.284,19.825 14.284,12.931 15.164,12.051 15.164,10.868 14.284,9.988 14.284,7.716 v1(15.5,6.5) ; J12.14 15.675,2.15 15.675,3.375 v1(15.7,3.4)
  L2 w0.254: v1(15.5,6.5) 15.7,6.3 v1(15.7,3.4)
  L4 w0.254: J19.2@16.373,28.96 11.293,28.96 11.293,34.04 J19.2@16.373,34.04
NetJ12_16: J12.16 J20.2 | length 50
  L1 w0.254: v1(14.6,3.3) 14.625,3.275 14.625,2.15 J12.16
  L2 w0.254: J20.2@6.54,28.96 9.6,25.9 12.32,25.9 14.284,23.936 14.284,22.931 15.164,22.051 15.164,20.705 13.776,19.317 13.776,14.287 11.994,12.505 11.994,10.738 12.874,9.858 12.874,8.274 12.469,7.869 12.469,5.716 14.377,3.808 14.377,3.589 14.6,3.367 v1(14.6,3.3)
  L4 w0.254: J20.2@6.54,28.96 1.46,28.96 1.46,34.04 J20.2@6.54,34.04
NetJ12_18: J12.18 J21.2 | length 45.9
  L1 w0.254: J12.18 13.625,2.15 13.625,3.358 13.746,3.48 v1(13.746,3.546)
  L3 w0.254: J21.2@30.96,18.96 J21.2@30.96,24.04 ; J21.2@36.04,18.96 J21.2@36.04,24.04
  L4 w0.254: v1(13.746,3.546) 13.746,3.613 14.105,3.972 14.105,4.213 16.131,6.239 16.131,6.285 16.577,6.731 17.098,6.731 19.387,9.02 19.387,9.457 21.536,11.606 21.647,11.606 24.522,14.481 24.522,14.591 26.553,16.622 26.823,16.622 29.161,18.96 30.96,18.96 J21.2@36.04,18.96 ; J21.2@30.96,24.04 J21.2@36.04,24.04
NetJ12_20: J12.20 J22.2 | length 35.8
  L1 w0.254: v1(12.454,3.154) 12.501,3.107 12.501,2.274 J12.20
  L3 w0.254: J22.2@21.127,18.96 26.207,18.96 26.207,24.04 J22.2@21.127,24.04
  L4 w0.254: v1(12.454,3.154) 12.473,3.173 12.473,3.479 12.469,3.483 12.469,7.281 12.874,7.686 12.874,8.415 16.198,11.74 16.308,11.74 18.872,14.303 18.872,16.705 J22.2@21.127,18.96
NetJ12_22: J12.22 J23.2 | length 34.2
  L1 w0.254: J12.22 11.675,2.15 11.675,3.375 v1(11.7,3.4)
  L2 w0.254: J23.2@11.293,18.96 9.204,16.871 9.204,8.095 10.428,6.871 10.749,6.871 11.205,6.415 11.205,3.895 v1(11.7,3.4)
  L3 w0.254: J23.2@11.293,18.96 16.373,18.96 16.373,24.04 J23.2@11.293,24.04
NetJ12_24: J12.24 J24.2 | length 33.9
  L1 w0.254: J24.2@6.54,18.96 8.629,16.871 8.629,8.371 10.088,6.912 10.088,6.706 10.487,6.307 v1(10.487,6.24) ; J12.24 10.625,2.15 10.625,3.191 10.744,3.309 v1(10.744,3.376)
  L2 w0.254: v1(10.487,6.24) 10.534,6.193 10.534,5.644 10.697,5.482 10.697,3.423 v1(10.744,3.376)
  L3 w0.254: J24.2@1.46,18.96 6.54,18.96 6.54,24.04 J24.2@1.46,24.04
NetJ12_26: J12.26 J25.2 | length 44.3
  L1 w0.254: v1(9.65,1.031) J12.26
  L2 w0.254: v1(9.65,1.031) 15.443,1.031 15.674,0.8 19.502,0.8 19.933,0.369 23.761,0.369 25,1.608 25,6.484 25.762,7.246 27.246,7.246 27.5,7.5 29.5,7.5 J25.2@30.96,8.96 ; J25.2@30.96,14.04 36.04,14.04 J25.2@36.04,8.96
  L3 w0.254: J25.2@30.96,8.96 J25.2@36.04,8.96
NetJ12_28: J12.28 J26.2 | length 45
  L1 w0.254: v1(8.6,1.031) 8.625,1.056 8.625,2.1 J12.28 ; J26.2@21.127,8.96 J26.2@21.127,14.04
  L2 w0.254: J26.2@21.127,8.96 J26.2@21.127,14.04
  L3 w0.254: J26.2@21.127,14.04 J26.2@26.207,14.04
  L4 w0.254: v1(8.6,1.031) 8.647,1.078 8.647,1.547 9,1.9 23.3,1.9 25,3.6 25,7.753 26.207,8.96 J26.2@26.207,14.04
NetJ12_30: J12.30 J27.2 | length 24.1
  L1 w0.254: J12.30 7.65,3.183
  L2 w0.254: J27.2@11.293,8.96 J27.2@11.293,14.04 ; J27.2@16.373,8.96 J27.2@16.373,14.04
  L3 w0.254: v1(7.8,3.4) 8.446,4.046 8.446,5.415 8.831,5.8 8.831,7.877 9.712,8.758 11.091,8.758 J27.2@11.293,8.96 ; J27.2@11.293,14.04 J27.2@16.373,14.04
NetJ12_32: J12.32 J28.2 | length 23.5
  L1 w0.254: J28.2@6.54,8.96 6.469,8.889 6.469,4.017 6.65,3.836 J12.32 6.625,2.15 6.625,3.375 6.6,3.4
  L2 w0.254: J28.2@1.46,8.96 J28.2@6.54,8.96 ; J28.2@1.46,14.04 6.54,14.04 J28.2@6.54,8.96 ; J28.2@6.57,8.93 J28.2@6.54,8.96
pads on no net: S1. S2. S3. S4.

## Other copper
L1:
  rectangle net GND: 0.5,94 25.5,99.5
  rectangle net GND: 7.5,-5.5 24,0
L4:
  rectangle net GND: 0.5,94 25.5,99.5
  rectangle net GND: 7.5,-5.5 24,0

## Silkscreen, mask and mechanical layers (free items; w line width, h text height)
Mechanical 1:
  the board outline again, w0.1
Mechanical 8:
  lines w0.5: 1.125,11.5 36.4,11.5 ; 1.125,21.5 36.4,21.5 ; 1.125,31.5 36.4,31.5 ; 1.125,41.5 36.4,41.5 ; 1.125,51.5 36.4,51.5 ; 1.125,61.5 36.4,61.5 ; 1.125,71.5 36.4,71.5 ; 1.125,81.5 36.4,81.5 ; 4,7.95 4,85.05 ; 13.833,7.95 13.833,85.05 ; 23.667,7.95 23.667,85.05 ; 33.5,7.95 33.5,85.05
  text "1" at 36.725,76.25 h1.02